# EAGLE board Electronic Schematic (EAGLE 7.6.0)
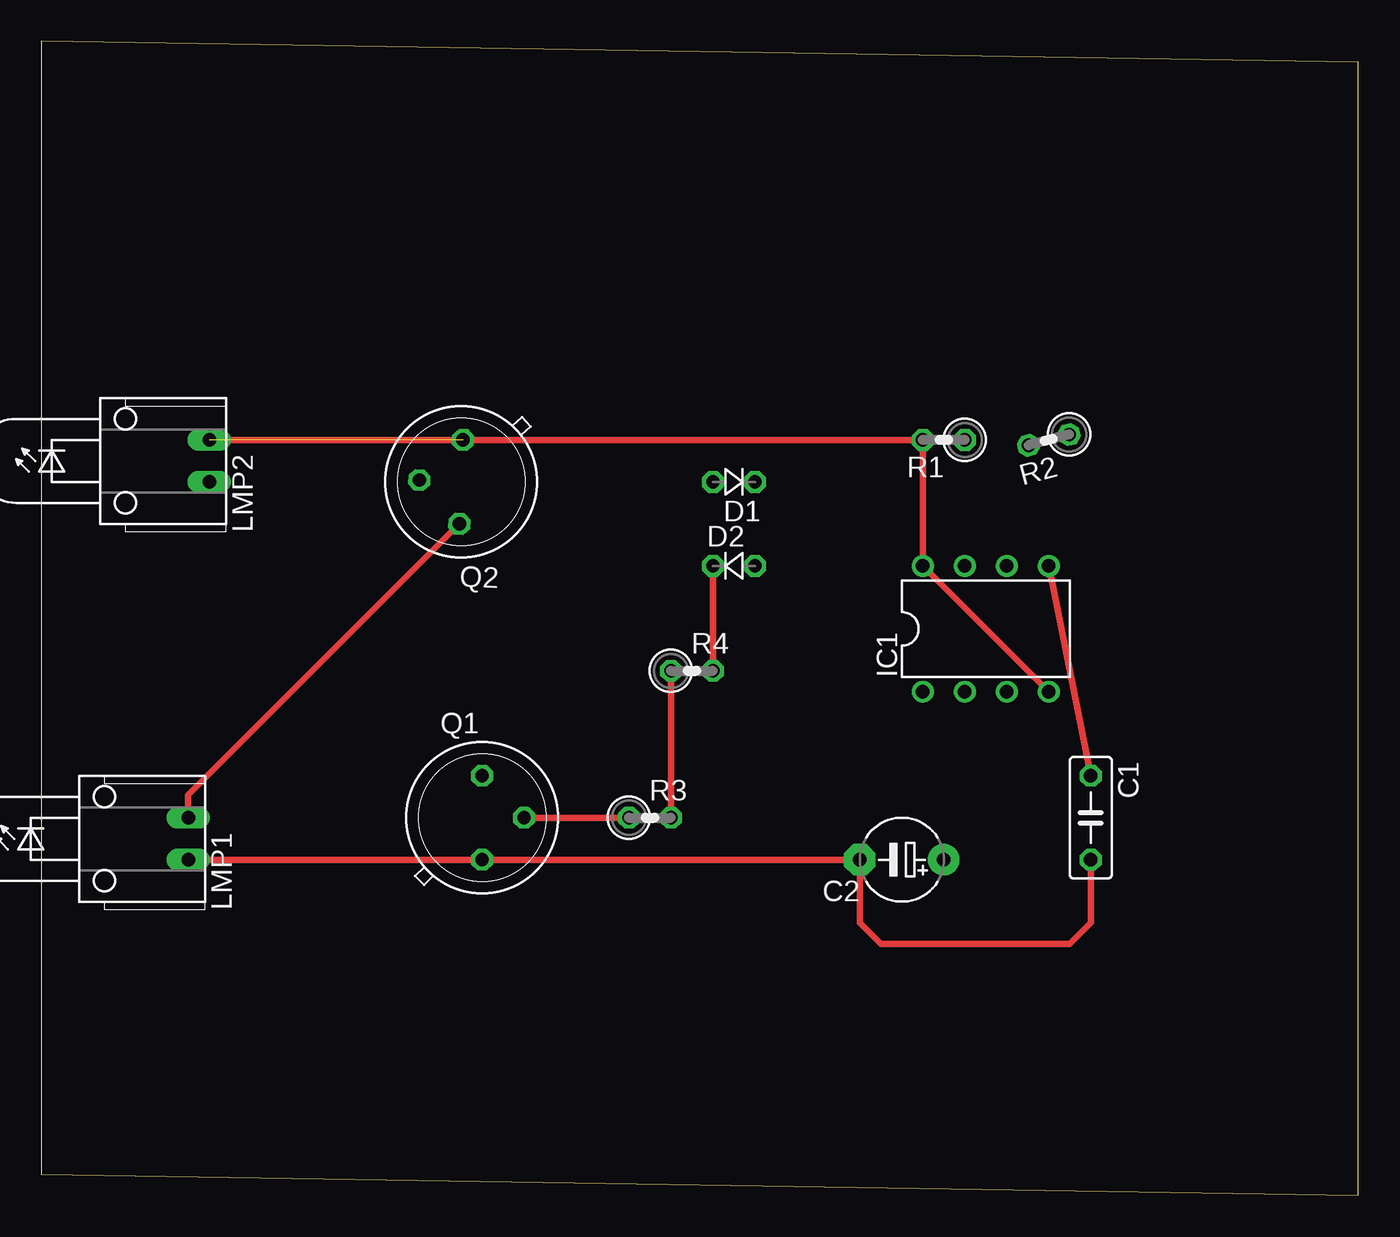
[diagram p0: board, top side]
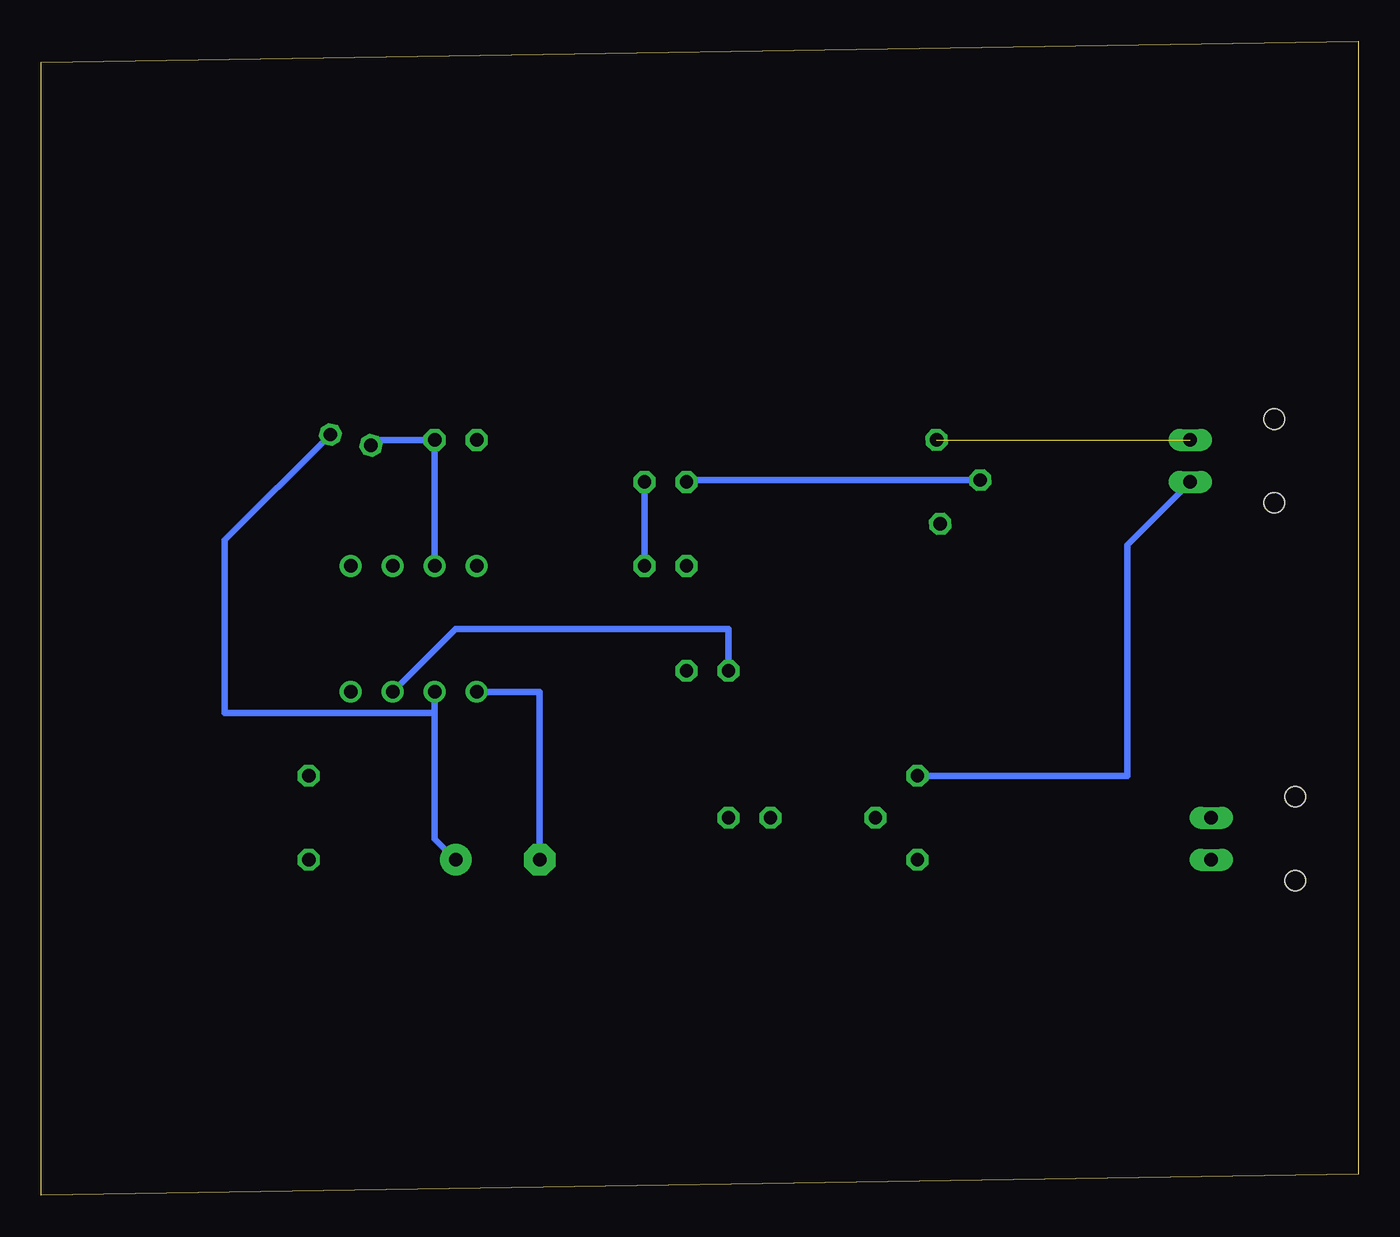
[diagram p1: board, bottom side, seen from below]

Size 79.68 x 69.84 mm. Coordinates in mm from the lower left corner, seen from the top.
Outline: 0,1.27 79.68,0 79.68,68.57 0,69.84 0,1.27
Copper layers (1*16): Top 0.035mm / dielectric 1.5mm / Bottom 0.035mm
Design rules "default": minimum track width 10mil, minimum drill 24mil, track to track 8mil, track to pad 8mil, pad to pad 8mil, via to via 8mil, smd to smd 8mil, copper to edge 40mil, drill to drill 8mil, minimum pad ring 10mil, minimum via ring 8mil, stop-mask expansion 4mil, vias tented up to drill 0mil, thermal gap 10mil

## Footprints (pad centres in the part's own frame; a part is rotated, then mirrored left to right if it is on the bottom)
C050-025X075 = drill 0.813 octagon: 1 -2.54,0; 2 2.54,0
E5-5 = drill 0.813 pad 1.905: + -2.54,0 | drill 0.813 pad 1.905 octagon: - 2.54,0
D-2.5 = drill 0.813 octagon: A 1.27,0; C -1.27,0
DIL08 = drill 0.813 pad 1.27: 1 -3.81,-3.81; 2 -1.27,-3.81; 3 1.27,-3.81; 4 3.81,-3.81; 5 3.81,3.81; 6 1.27,3.81; 7 -1.27,3.81; 8 -3.81,3.81
LDH-5R = drill 0.813 long: 1 -1.27,-5.08; 2 1.27,-5.08 | hole 1.219: 2.54,0; -2.54,0
TO39 = drill 0.813 octagon: 1 0,-2.54; 2 2.54,0; 3 0,2.54
0207/2V = drill 0.813 octagon: 1 -1.27,0; 2 1.27,0

## Placement (x,y rotation side)
C1  0.1 uF  [C050-025X075]  63.5,22.86 270 top
C2  4.7 uF  [E5-5]  52.07,20.32 180 top
D1  1n914 or similar  [D-2.5]  41.91,43.18 180 top
D2  [D-2.5]  41.91,38.1 0 top
IC1  LM555N  [DIL08]  57.15,34.29 0 top
LMP1  PR3  [LDH-5R]  3.81,21.59 90 top
LMP2  PR3  [LDH-5R]  5.08,44.45 90 top
Q1  2N3053  [TO39]  26.67,22.86 0 top
Q2  2N3053  [TO39]  25.4,43.18 177.5 top
R1  4.7k  [0207/2V]  54.61,45.72 180 top
R2  100k  [0207/2V]  60.96,45.72 194.8 top
R3  220  [0207/2V]  36.83,22.86 0 top
R4  100  [0207/2V]  39.37,31.75 0 top

## Library data of the parts
C1 = resistor
C2 R1-R4 = rcl
D1 D2 = diode
IC1 = linear
LMP1 LMP2 = special
Q1 Q2 = transistor-small-signal

## Nets
GND: C1.2 C2.- IC1.1 LMP1.1 Q1.1
N$1: IC1.4 IC1.8 LMP2.2 Q2.1 R1.2
N$2: LMP2.1 Q1.3
N$3: IC1.7 R1.1 R2.2
N$4: C2.+ IC1.2 R2.1
N$5: C1.1 IC1.5
N$6: D1.C D2.A
N$7: D2.C R4.2
N$8: IC1.3 R3.2 R4.1
N$9: LMP1.2 Q2.3
N$10: D1.A Q2.2
N$11: Q1.2 R3.1

## Tracks (layer width: path | path; a pad name or v marks a point on that pad's centre or on a via)
GND
  Top 0.406: C1.2 63.5,16.51 62.23,15.24 50.8,15.24 49.53,16.51 C2.- Q1.1 LMP1.1
  Bottom 0.406: C2.- 49.53,30.48 IC1.1
N$1  (1 unrouted)
  Top 0.406: LMP2.2 R1.2 IC1.8 IC1.4
N$2
  Bottom 0.406: LMP2.1 13.97,39.37 13.97,25.4 Q1.3
N$3
  Bottom 0.406: IC1.7 R1.1 59.41,45.72 R2.2
N$4
  Bottom 0.406: C2.+ 55.88,21.59 55.88,29.21 | 55.88,29.21 IC1.2 | R2.1 68.58,39.65 68.58,29.21 55.88,29.21
N$5
  Top 0.406: IC1.5 C1.1
N$6
  Bottom 0.406: D2.A D1.C
N$7
  Top 0.406: D2.C R4.2
N$8
  Top 0.406: R3.2 R4.1
  Bottom 0.406: IC1.3 54.61,34.29 38.1,34.29 R4.1
N$9
  Top 0.406: LMP1.2 8.89,24.24 Q2.3
N$10
  Bottom 0.406: D1.A 40.53,43.29 Q2.2
N$11
  Top 0.406: Q1.2 R3.1